# EAGLE board DigitalOutLED-01 (EAGLE 6.2)
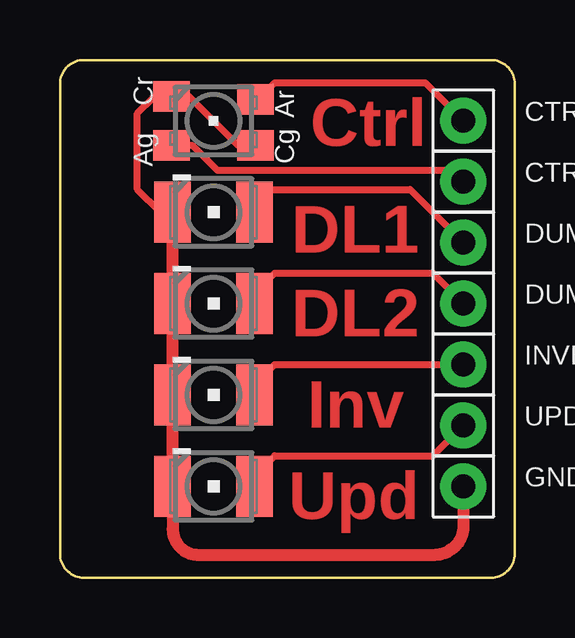
[diagram p0: board, top side]
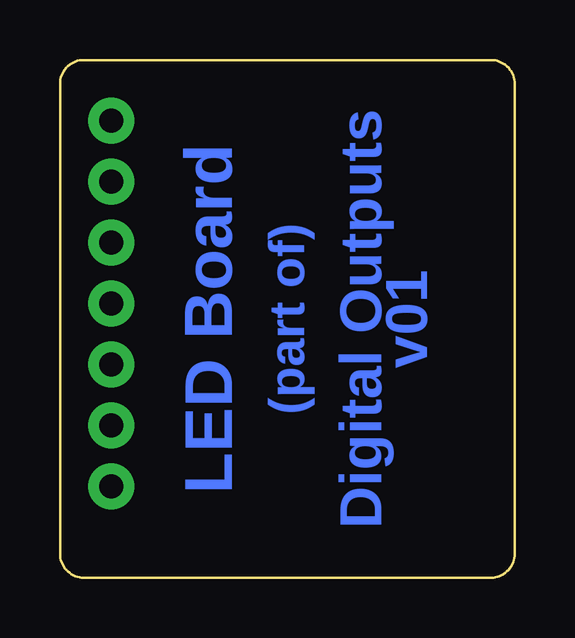
[diagram p1: board, bottom side, seen from below]

Size 18.95 x 21.59 mm. Coordinates in mm from the lower left corner, seen from the top.
Outline: 1,0 17.95,0 arc90 18.95,1 18.95,20.59 arc90 17.95,21.59 1,21.59 arc90 0,20.59 0,1 arc90 1,0
Copper layers (1*16): Top 0.035mm / dielectric 1.5mm / Bottom 0.035mm
Design rules: minimum track width 12mil, minimum drill 0.7mm, track to track 25mil, track to pad 20mil, pad to pad 15mil, via to via 20mil, smd to smd 0mil, copper to edge 30mil, drill to drill 10mil, minimum pad ring 18mil, minimum via ring 15mil, stop-mask expansion 0mil, vias tented up to drill 0mil, thermal gap 15mil

## Footprints (pad centres in the part's own frame; a part is rotated, then mirrored left to right if it is on the bottom)
PLCC4 = smd 1.27 x 1.524: AG 1.016,-1.746; AR -0.889,1.746; CG 1.016,1.746; CR -1.016,-1.746
1X1HEADER = drill 1: P$1 0,0
PLCC2 = smd 2.54 x 1.524: A 0,1.702; C 0,-1.702

## Placement (x,y rotation side)
CTRL  PLCC4-RG  [PLCC4]  6.4,19.05 270 top
CTRL-G  1X1HEADER  [1X1HEADER]  16.81,16.51 0 top
CTRL-R  1X1HEADER  [1X1HEADER]  16.81,19.05 0 top
DL1  PLCC2  [PLCC2]  6.4,15.24 270 top
DL2  PLCC2  [PLCC2]  6.4,11.43 270 top
DUMPLOAD1  1X1HEADER  [1X1HEADER]  16.81,13.97 0 top
DUMPLOAD2  1X1HEADER  [1X1HEADER]  16.81,11.43 0 top
GND  1X1HEADER  [1X1HEADER]  16.81,3.81 0 top
INVERTER  PLCC2  [PLCC2]  6.4,7.62 270 top
INVERTER-  1X1HEADER  [1X1HEADER]  16.81,8.89 0 top
UPDATE  PLCC2  [PLCC2]  6.4,3.81 270 top
UPDATE-  1X1HEADER  [1X1HEADER]  16.81,6.35 0 top

## Library data of the parts
CTRL DL1 DL2 INVERTER UPDATE = PCB_ControlStack
CTRL-G CTRL-R DUMPLOAD1 DUMPLOAD2 GND INVERTER- UPDATE- = headers v6-2

## Nets
GND: CTRL.CG CTRL.CR DL1.C DL2.C GND.P$1 INVERTER.C UPDATE.C
N$1: UPDATE-.P$1 UPDATE.A
N$2: INVERTER-.P$1 INVERTER.A
N$3: DL2.A DUMPLOAD2.P$1
N$4: DL1.A DUMPLOAD1.P$1
N$5: CTRL-R.P$1 CTRL.AR
N$6: CTRL-G.P$1 CTRL.AG

## Tracks (layer width: path | path; a pad name or v marks a point on that pad's centre or on a via)
GND
  Top 0.3: CTRL.CG 7.41,18.03 5.38,20.07 CTRL.CR 4.59,20 3.86,20 3.22,19.37 3.22,16.19 4.17,15.24 DL1.C
  Top 0.5: DL1.C DL2.C INVERTER.C UPDATE.C 4.7,2.02 arc90 5.76,0.95 15.61,0.95 arc90 16.81,2.16 GND.P$1
N$1
  Top 0.3: UPDATE.A 8.1,4.24 8.94,5.08 15.54,5.08 UPDATE-.P$1
N$2
  Top 0.3: INVERTER.A 8.1,8.05 8.94,8.89 INVERTER-.P$1
N$3
  Top 0.3: DL2.A 8.1,11.86 8.94,12.7 15.54,12.7 DUMPLOAD2.P$1
N$4
  Top 0.3: DL1.A 8.1,15.67 8.62,16.19 14.59,16.19 DUMPLOAD1.P$1
N$5
  Top 0.3: CTRL.AR 8.24,19.94 8.94,20.64 15.22,20.64 CTRL-R.P$1
N$6
  Top 0.3: CTRL.AG 5.51,18.03 6.56,16.99 16.33,16.99 CTRL-G.P$1

## Text on the board
Top: Ctrl | DL1 | DL2 | Inv | Upd
Bottom: v01 | Digital Outputs | (part of) | LED Board